# Altium PCB PCB.PcbDoc
Units mm, origin at the board's own origin, x right, y up, seen from the top; angles counter-clockwise.
Board outline 18.3 x 49.6 mm, 2 copper layers (Top Layer, Bottom Layer), stack 1.57 mm thick; 20 components, 30 nets, 91 pads, 23 vias.
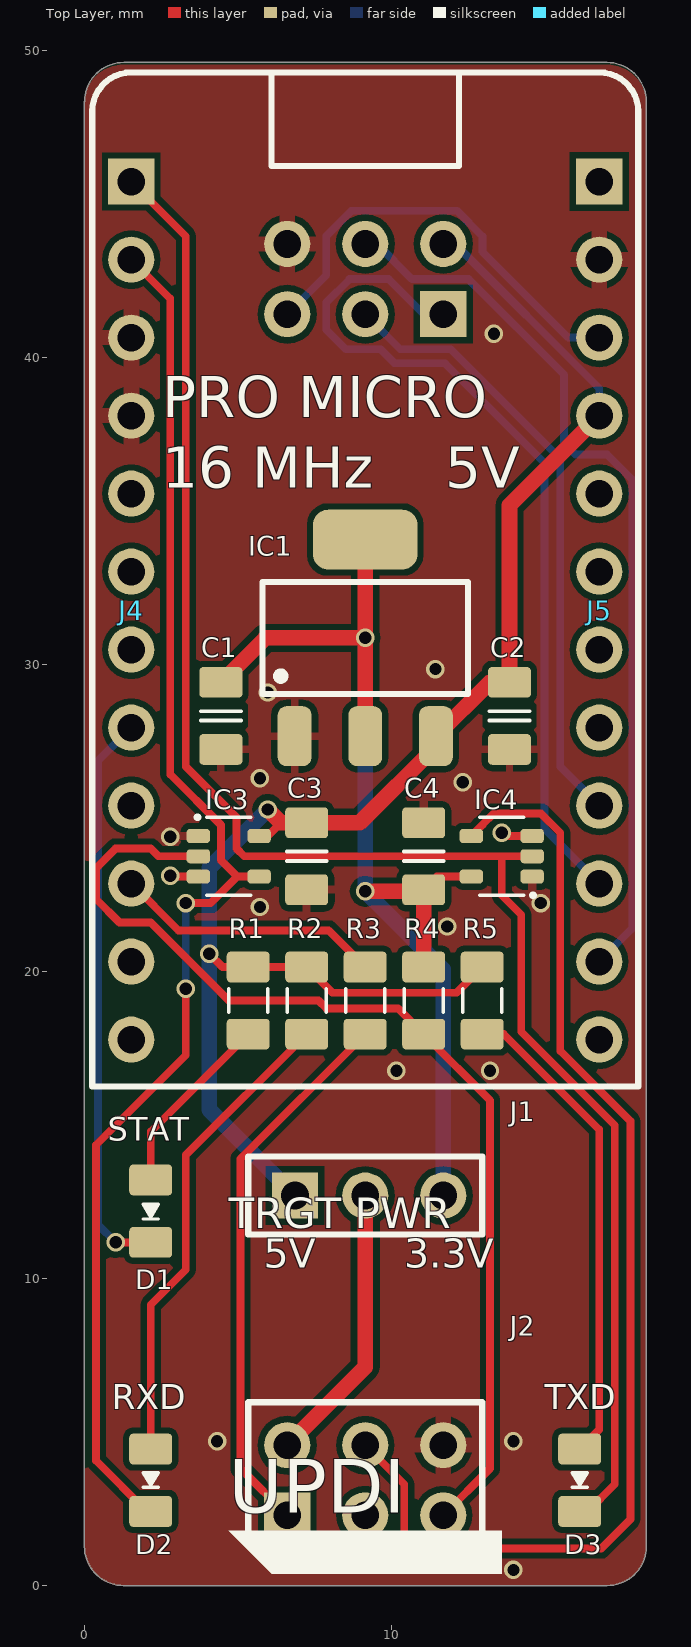
[diagram p0: Top Layer view]
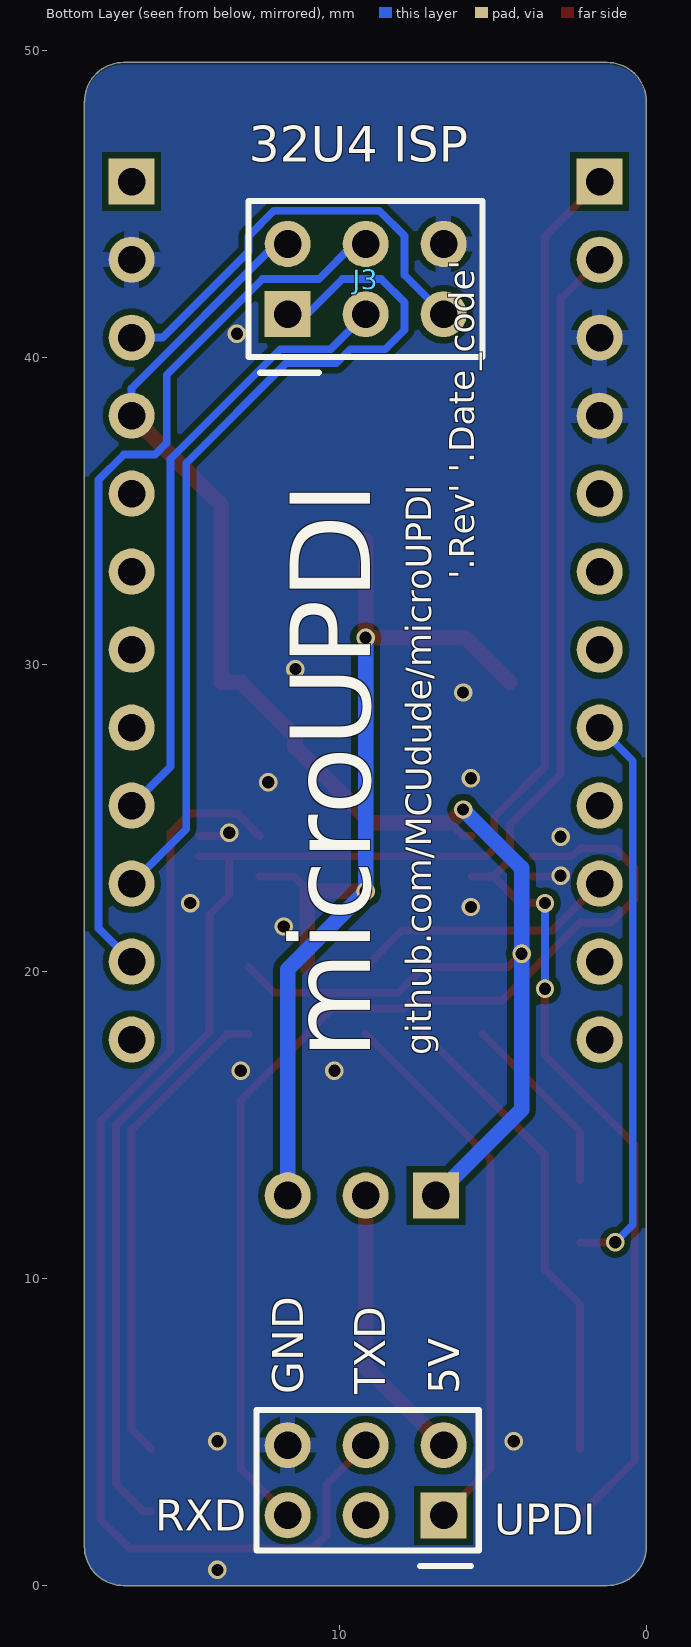
[diagram p1: Bottom Layer view, seen from below]
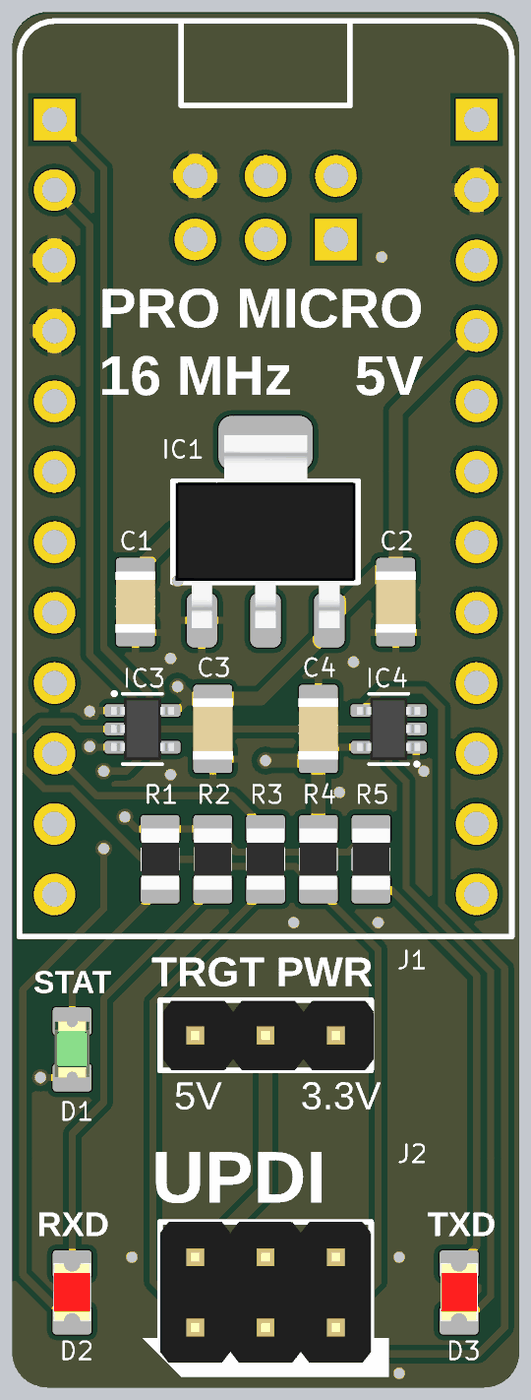
[diagram p2: 3D render of the assembled board from above, using the file's embedded part models]

## Layer stack, top to bottom
Top Solder: solder mask 0.015, Solder Resist, Dk 3.5
Top Layer: signal copper 0.035
Dielectric 1: core 1.5, PP 7628, Dk 4.2
Bottom Layer: signal copper 0.035
Bottom Solder: solder mask 0.015, Solder Resist, Dk 3.5

## Board outline
0,1.27 0,48.33 0.005,48.33 cw(c1.275,48.33) 1.275,49.6 17.025,49.6 cw(c17.025,48.33) 18.295,48.33 18.3,48.33 18.3,1.27 cw(c17.03,1.27) 17.03,0 1.27,0 cw(c1.27,1.27)

## Design rules (kind name [scope] priority, off if disabled: settings)
BoardOutlineClearance [All] p1 off: gap=0.254 ignorepadtopadclearanceinfootprint=FALSE except(0: Arc-SplitContinuation Track-SplitContinuation SMDPad-SplitContinuation THPad-OutlineEdge THPad-CavityEdge THPad-CutoutEdge THPad-SplitBarrior THPad-SplitContinuation Via-SplitContinuation Fill-SplitContinuation Poly-OutlineEdge Poly-CavityEdge Poly-CutoutEdge Poly-SplitBarrior Poly-SplitContinuation Region-SplitContinuation Text-SplitContinuation; 0.1: Text-OutlineEdge Text-CavityEdge Text-CutoutEdge Text-SplitBarrior; 1: SMDPad-OutlineEdge SMDPad-CavityEdge SMDPad-CutoutEdge SMDPad-SplitBarrior)
Clearance LED_clearance [HasFootprint('LED-1305-REVERSED-WHITE') OR HasFootprint('LED-1305-REVERSED-BLUE')] p1: gap=0.889 ignorepadtopadclearanceinfootprint=TRUE
Clearance FiducialClearance [HasFootprint('FIDUCIAL_1x3MM')] p2: gap=1.016 ignorepadtopadclearanceinfootprint=TRUE
Clearance [All] p3: gap=0.203 ignorepadtopadclearanceinfootprint=TRUE
ComponentClearance [All] p1: gap=0.254 collisioncheckmode=3 verticalgap=-0.127 showdistances=FALSE
HoleSize [All] p1: absolutevalues=TRUE maxlimit=10.16 minlimit=0.025 maxpercent=80.000 minpercent=20.000
MinimumSolderMaskSliver [All] p1: minsoldermaskwidth=0
PlaneClearance [All] p1: clearance=0.203
PlaneConnect [All] p1: pad.planeconnectstyle=Relief pad.reliefexpansion=0.254 pad.reliefentries=4 pad.reliefconductorwidth=0.254 pad.reliefairgap=0.254 via.planeconnectstyle=Direct via.reliefexpansion=0.508 via.reliefentries=4 via.reliefconductorwidth=0.254 via.reliefairgap=0.254
PolygonConnect D2PAK_connect [HasFootprint('TO-263-5')] p1: connectstyle=Relief reliefconductorwidth=0.508 reliefentries=4 polygonreliefangle="90 Angle" airgapwidth=0.203
PolygonConnect Mounting_hole_connect [asMM(HoleDiameter) = 3.2] p2: connectstyle=Direct reliefconductorwidth=0.254 reliefentries=4 polygonreliefangle="90 Angle" airgapwidth=0.254
PolygonConnect [All] p3: thpad.connectstyle=Relief thpad.reliefconductorwidth=0.508 thpad.reliefentries=4 thpad.polygonreliefangle="90 Angle" thpad.airgapwidth=0.203 smdpad.connectstyle=Relief smdpad.reliefconductorwidth=0.254 smdpad.reliefentries=4 smdpad.polygonreliefangle="90 Angle" smdpad.airgapwidth=0.203 via.connectstyle=Direct via.reliefconductorwidth=0.254 via.reliefentries=4 via.polygonreliefangle="90 Angle" via.airgapwidth=0.254
RoutingVias [All] p1: holewidth=0.5 width=1 viastyle="Through Hole" minholewidth=0.4 minwidth=0.6 maxholewidth=1 maxwidth=1.25
SilkToSilkClearance [All] p1: silktosilkclearance=0.076
SilkToSolderMaskClearance [IsPad] p1: minsilkscreentomaskgap=0.076 clearancetoexposedcopper=TRUE
SolderMaskExpansion [All] p1: expansion=0.05
UnRoutedNet [All] p1: checkbadconnections=TRUE
Width [All] p1: maxlimit=2.54 minlimit=0.203 preferedwidth=0.254
22 further rules are at their usual default settings.

## Components (designator, comment, footprint, x,y, rotation, side; value= is the part's Value field where it differs from the comment)
C1 "Generic bipolar capacitor" "0805 CAPACITOR" 4.445,28.321 r90 top value=1u
C2 "Generic bipolar capacitor" "0805 CAPACITOR" 13.843,28.321 r90 top value=1u
C3 "Generic bipolar capacitor" "0805 CAPACITOR" 7.239,23.749 r90 top value=100n
C4 "Generic bipolar capacitor" "0805 CAPACITOR" 11.049,23.749 r270 top value=100n
D1 "Green" LED-GREEN-0805 2.159,12.192 r270 top
D2 "Red" LED-RED-0805 2.159,3.429 r270 top
D3 "Red" LED-RED-0805 16.129,3.429 r270 top
IC1 "1117-3.3" SOT-223 9.144,30.861 r0 top
IC3 "74LVC1G125" SOT-353 4.699,23.749 r270 top
IC4 "74LVC1G125" SOT-353 13.589,23.749 r90 top
J1 "HEADER 1x3 MALE" HEADER-MALE-STRAIGHT-1x3-LOCKED 9.144,12.7 r0 top (schematic designator J2)
J2 "HEADER 2x3 MALE" HEADER-MALE-STRAIGHT-2x3-LOCKED 9.144,3.429 r0 top (schematic designator J1)
J3 "HEADER 2x3 MALE" HEADER-MALE-STRAIGHT-2x3-LOCKED 9.144,42.545 r180 bottom
J4 "HEADER 1x12 FEMALE" HEADER-FEMALE-STRAIGHT-1x12 1.524,31.75 r270 top
J5 "HEADER 1x12 FEMALE" HEADER-FEMALE-STRAIGHT-1x12 16.764,31.75 r270 top
R1 "Generic resistor" "0805 RESISTOR" 5.334,19.05 r270 top value=1k (schematic designator R3)
R2 "Generic resistor" "0805 RESISTOR" 7.239,19.05 r270 top value=1k (schematic designator R1)
R3 "Generic resistor" "0805 RESISTOR" 9.144,19.05 r270 top value=330R (schematic designator R5)
R4 "Generic resistor" "0805 RESISTOR" 11.049,19.05 r90 top value=10k
R5 "Generic resistor" "0805 RESISTOR" 12.954,19.05 r270 top value=1k (schematic designator R2)

## Footprints (in the part's own frame and the unit in brackets; to place one, negate y for a bottom-side part, rotate by r counter-clockwise, add the part's x,y. Pads: shape width x height; smd on the part's side, far side on the other; paste and mask are expansions set on the pad)
"0805 CAPACITOR" [mm] "Chip Capacitor, Body 2.0x1.2mm, EIA 0805, IPC Medium Density"
  round 0.254 on Mech15: 0(0,0)
  rrect25% 1x1.4 smd: 1(-1.092,0) 2(1.092,0)
  Top Layer pour cut-out: -0.559,0.686 -0.356,0.889 0.356,0.889 0.559,0.686 0.559,-0.686 0.356,-0.889 -0.356,-0.889 -0.559,-0.686
  silkscreen extent -0.15,-0.65 0.15,0.65, body extent -1.1,-0.72 1.1,0.73, height 1.34
"0805 RESISTOR" [mm] "Chip Resistor, Body 2.0x1.2mm, EIA 0805, IPC Medium Density"
  round 0.254 on Mech15: 0(0,0)
  rrect25% 1x1.4 smd: 1(-1.092,0) 2(1.092,0)
  Top Layer pour cut-out: -0.559,0.686 -0.356,0.889 0.356,0.889 0.559,0.686 0.559,-0.686 0.356,-0.889 -0.356,-0.889 -0.559,-0.686
  silkscreen extent -0.38,-0.64 0.38,0.64, body extent -1.1,-0.67 1.1,0.68, height 0.69
HEADER-FEMALE-STRAIGHT-1x12 [mm]
  rect 1.5x1.5 hole 0.9: 1(-13.97,0)
  round 1.5 hole 0.9: 2(-11.43,0) 3(-8.89,0) 4(-6.35,0) 5(-3.81,0) 6(-1.27,0) 7(1.27,0) 8(3.81,0) 9(6.35,0) 10(8.89,0) 11(11.43,0) 12(13.97,0)
HEADER-MALE-STRAIGHT-1x3-LOCKED [mm]
  rect 1.5x1.5 hole 0.9: 1(-2.286,0)
  round 1.5 hole 0.9: 2(0,0) 3(2.54,0)
  silkscreen extent -3.81,-1.27 3.81,1.27, body extent -3.71,-1.25 3.91,1.25, height 8.2
HEADER-MALE-STRAIGHT-2x3-LOCKED [mm]
  rect 1.5x1.5 hole 0.9: 1(-2.54,-1.143)
  round 1.5 hole 0.9: 2(-2.54,1.143) 3(0,-1.143) 4(0,1.143) 5(2.54,-1.143) 6(2.54,1.143)
  silkscreen extent -3.81,-2.54 3.81,2.54, body extent -3.81,-2.54 3.81,2.54, height 8.6
LED-GREEN-0805 [mm]
  round 0.254 on Mech15: 0(0,0)
  rrect25% 1x1.4 smd: A(-1.016,0) K(1.016,0)
  silkscreen extent -0.23,-0.25 0.25,0.25, body extent -1.01,-0.62 1.01,0.63, height 1.15
LED-RED-0805 [mm]
  round 0.254 on Mech15: 0(0,0)
  rrect25% 1x1.4 smd: A(-1.016,0) K(1.016,0)
  silkscreen extent -0.25,-0.25 0.23,0.25, body extent -1.05,-0.67 1.05,0.68, height 0.95
SOT-223 [mm] "SOT-223/SC-73; 4 Leads; Body 6.7 x 7.3 mm, inc. leads (LxW max)"
  rrect50% 1.1x1.95 smd: 1(-2.3,-3.2) 2(0,-3.2) 3(2.3,-3.2)
  rrect50% 3.4x1.95 smd: 4(0,3.2)
  silkscreen extent -3.35,-1.83 3.35,1.83, body extent -3.25,-3.48 3.25,3.48, height 1.66
SOT-353 [mil] "SOT-353; 5 Leads; Body 2.05x1.25 mm"
  round 19.68 on Mech15: 0(0,0)
  rrect50% 18x30 smd: 1(-26,-39) 2(0,-39) 3(26,-39) 4(26,39) 5(-26,39)
  silkscreen extent -50,-40 50,28, body extent -44,-45 44,45, height 43

## Part data
C1 C2: library part CAP-CER-0805-1U-16V, "Cap Ceramic 0805 1u 16V Y5V", Dielectric=Y5V, Package=0805, Voltage Rating=16V, Component type=Capacitor, Notes="Generic, choose one that meets spec"
C3 C4: library part CAP-CER-0805-100N-50V, "Cap Ceramic 0805 100n 50V X7R", Dielectric=X7R, Package=0805, Voltage Rating=50V, Component type=Capacitor, Notes="Generic, choose one that meets spec"
D1: library part LED-0805-GREEN, "LED 0805 Green", Package=0805, Component type=LED
D2 D3: library part LED-0805-RED, "LED 0805 Red", Package=0805, Component type=LED
IC1: library part REG-POS-3.3V-1117, "Positive 3.3V regulator 1A SOT-223", Package=SOT-223, Component type=IC, Manufacturer Part Number=1117-3.3, Notes="Generic 1117-3.3"
IC3 IC4: library part IC-74LVC1G125, "Singe Buffer with 3-State Output", Package=SOT-353, Component type=IC, Manufacturer Part Number=74LVC1G125
J1: library part CON-HEADER-MALE-STRAIGHT-1x3, "Header male straight 1x3", Component type=Connector
J2 J3: library part CON-HEADER-MALE-STRAIGHT-2x3, "Header male straight 2x3", Component type=Connector
J4 J5: library part CON-HEADER-FEMALE-STRAIGHT-1x12, "Header female straight 1x12", Component type=Connector
R1 R2 R5: library part RES-0805-1k, "Resistor 0805 1k 1%", Package=0805, Tolerence=1%, Component type=Resistor, Notes="Generic, choose one that meets spec"
R3: library part RES-0805-330R, "Resistor 0805 330R 1%", Package=0805, Component type=Resistor, Notes="Generic, choose one that meets spec"
R4: library part RES-0805-10k, "Resistor 0805 10k 1%", Package=0805, Component type=Resistor, Notes="Generic, choose one that meets spec"

## Via types
v1: diameter 0.6, hole 0.4, Top Layer to Bottom Layer, tented both sides, 23 vias

## Nets (pads, with @x,y where several pads share a name; then routed paths per layer and width w, separated by ;. In a path a pad name is that pad's centre, name@x,y a point inside that pad or via, vN(x,y) a via of type N, cw(c..) or ccw(c..) an arc to the next point about the centre after c; other vN are vias at no path point)
+3.3V: C1.2 C4.2 IC1.2 IC1.4 IC4.5 J1.3 R4.2 | length 37.1
  Top Layer w0.254: C4.2 11.481,23.089 IC4.5
  Top Layer w0.508: C1.2 5.893,30.861 v1(9.144,30.861) ; v1(9.144,22.606) 10.998,22.606 C4.2 R4.2 ; IC1.2 v1(9.144,30.861) ; IC1.4 v1(9.144,30.861)
  Bottom Layer w0.508: v1(9.144,30.861) v1(9.144,22.606) 11.684,20.066 J1.3
+5V: C2.2 C3.2 IC1.3 IC3.5 J1.1 J3.2 J5.4 R1.1 R2.1 R5.1 | length 53.1
  Top Layer w0.254: v1(4.064,20.574) 4.496,20.142 R1.1 R2.1 8.077,19.304 12.116,19.304 R5.1 ; IC3.5 5.969,24.409 6.401,24.841
  Top Layer w0.508: v1(5.969,25.273) 6.401,24.841 C3.2 8.966,24.841 11.444,27.319 IC1.3 13.196,29.413 C2.2 13.843,35.179 J5.4
  Bottom Layer w0.254: J3.2 12.065,43.688 16.764,38.989 J5.4
  Bottom Layer w0.508: v1(5.969,25.273) 4.064,23.368 v1(4.064,20.574) 4.064,15.494 J1.1
\R\S\T\: J3.5 J5.3 | length 14.3
  Bottom Layer w0.254: J3.5 7.874,42.672 7.874,43.946 8.697,44.768 12.131,44.768 12.96,43.94 12.96,43.44 15.76,40.64 J5.3
A0: J5.8
A1: J5.7
A2: J5.6
A3: J5.5
D2: J4.5
D3: J4.6
D4: J4.7
D5/STATUS: D1.K J4.8 | length 18.6
  Top Layer w0.254: v1(1.016,11.176) D1.K
  Bottom Layer w0.254: v1(1.016,11.176) 0.444,11.748 0.444,26.86 J4.8
D6: J4.9
D7: J4.10 R3.1 | length 8.7
  Top Layer w0.254: J4.10 1.536,22.86 3.06,21.336 7.95,21.336 R3.1
D8: J4.11
D9: J4.12
D10: J5.12
GND: C1.1 C2.1 C3.1 C4.1 IC1.1 IC3.1 IC3.3 IC4.1 IC4.3 J2.6 J3.6 J4.3 J4.4 J5.2 | length 2
  Top Layer w0.254: v1(2.794,23.114) 2.819,23.089 IC3.3 ; v1(13.589,24.511) 13.691,24.409 IC4.3
  other v1: 13.97,0.508 4.318,4.699 13.97,4.699 10.16,16.764 13.208,16.764 11.811,21.463 5.715,22.098 14.859,22.225 2.794,24.384 12.319,26.162 5.715,26.289 5.969,29.083 11.43,29.845 13.335,40.767
MISO: J3.1 J5.10 | length 28.8
  Bottom Layer w0.254: J3.1 11.049,41.402 9.906,42.545 8.636,42.545 7.874,41.783 7.874,40.894 8.509,40.259 9.64,40.259 10.098,39.802 11.737,39.802 14.986,36.553 14.986,24.638 J5.10
MOSI: J3.4 J5.11 | length 29.3
  Bottom Layer w0.254: J3.4 9.525,43.688 10.668,42.545 12.508,42.545 15.621,39.432 15.621,37.211 16.002,36.83 17.022,36.83 17.844,36.007 17.844,21.4 J5.11
NetD1_A: D1.A R1.2 | length 6.1
  Top Layer w0.254: D1.A 2.159,14.783 R1.2
NetD2_A: D2.A R2.2 | length 15.6
  Top Layer w0.254: D2.A 2.159,9.144 3.302,10.287 3.302,14.021 R2.2
NetD2_K: D2.K IC3.4 J4.2 | length 46.1
  Top Layer w0.254: J4.2 2.794,41.91 2.794,26.416 4.445,24.765 4.445,23.622 4.978,23.089 ; D2.K 2.032,2.413 0.381,4.064 0.381,14.351 3.302,17.272 v1(3.302,19.431) ; v1(3.302,22.225) 4.115,22.225 4.978,23.089 ; IC3.4 4.978,23.089
  Bottom Layer w0.254: v1(3.302,19.431) v1(3.302,22.225)
NetD3_A: D3.A R5.2 | length 15.8
  Top Layer w0.254: R5.2 13.654,17.958 16.764,14.847 16.764,5.08 D3.A
NetD3_K: D3.K IC4.2 J4.1 | length 56.4
  Top Layer w0.254: J4.1 3.302,43.942 3.302,26.67 4.953,25.019 4.953,24.003 5.207,23.749 13.589,23.749 ; IC4.2 13.589,23.749 ; D3.K 16.383,2.413 17.272,3.302 17.272,14.986 14.224,18.034 14.224,21.844 13.589,22.479 13.589,23.749
RXD: IC3.2 J2.5 R4.1 | length 34.4
  Top Layer w0.254: IC3.2 2.413,23.749 2.159,24.003 1.016,24.003 0.381,23.368 0.381,22.352 1.143,21.59 2.157,21.59 4.697,19.05 7.62,19.05 7.874,18.796 10.211,18.796 R4.1 13.208,15.799 13.208,3.81 J2.5
SCK: J3.3 J5.9 | length 20.1
  Bottom Layer w0.254: J3.3 10.287,40.259 11.926,40.259 15.494,36.691 15.494,26.67 J5.9
TXD: IC4.4 J2.4 | length 38.2
  Top Layer w0.254: J2.4 10.414,3.302 10.414,1.651 10.859,1.206 16.827,1.206 17.78,2.159 17.78,15.125 15.494,17.411 15.494,24.511 14.864,25.141 13.328,25.141 12.959,24.772 12.959,24.77 IC4.4
UPDI: J2.1 R3.2 | length 18
  Top Layer w0.254: J2.1 5.08,3.81 5.08,13.894 R3.2
VCC: J1.2 J2.2 | length 9.2
  Top Layer w0.508: J2.2 9.144,7.112 J1.2
VIN: J5.1
pads on no net: C1.0 C2.0 C3.0 C4.0 D1.0 D2.0 D3.0 IC3.0 IC4.0 J2.3 R1.0 R2.0 R3.0 R4.0 R5.0

## Polygon pours and split planes (outlines as drawn)
GND on Bottom Layer "GND bottom" (solid, remove dead copper, pour order 0): 0,1.27 0,48.26 cw(c1.27,48.26) 1.27,49.53 17.018,49.53 cw(c17.018,48.26) 18.288,48.26 18.288,1.27 cw(c17.018,1.27) 17.018,0 1.27,0 cw(c1.27,1.27)
GND on Top Layer "GND top" (solid, remove dead copper, pour order 2): 0,1.27 0,48.26 cw(c1.27,48.26) 1.27,49.53 17.018,49.53 cw(c17.018,48.26) 18.288,48.26 18.288,1.27 cw(c17.018,1.27) 17.018,0 1.27,0 cw(c1.27,1.27)

## Silkscreen, mask and mechanical layers (free items; w line width, h text height)
Top Overlay:
  region: 13.589,1.778 13.589,0.381 6.096,0.381 4.699,1.778
  lines w0.2: 6.096,49.276 6.096,46.228 12.192,46.228 12.192,49.276 ; 0.254,16.256 0.254,45.72 0.254,48.006 cw(c1.524,48.006) 1.524,49.276 14.732,49.276 16.764,49.276 cw(c16.764,48.006) 18.034,48.006 18.034,16.256 0.254,16.256
  text "PRO MICRO / 16 MHz    5V" at 2.54,35.306 h2.3
  text "STAT" at 0.762,14.224 h1.3
  text "TRGT PWR" at 4.699,11.303 h1.7
  text "5V" at 5.842,10.033 h1.6
  text "3.3V" at 10.414,10.033 h1.6
  text "RXD" at 0.889,5.461 h1.4
  text "TXD" at 14.986,5.461 h1.4
  text "UPDI" at 4.699,1.778 h3
Bottom Overlay:
  lines w0.2: 5.715,0.635 7.366,0.635 ; 10.668,39.497 12.573,39.497 ; 10.668,40.005 12.7,40.005 ; 5.461,1.143 12.7,1.143 12.7,5.715 5.461,5.715 5.461,1.143
  text "32U4 ISP" at 12.954,45.974 h2
  text "'.Rev' '.Date_code'" at 5.334,32.766 h1.4 r270
  text "github.com/MCUdude/microUPDI" at 6.731,17.272 h1.43 r270
  text "microUPDI" at 8.128,17.145 h4.5 r270
  text "5V" at 6.096,6.223 h1.02 r270
  text "TXD" at 8.509,6.223 h1.02 r270
  text "GND" at 11.176,6.223 h1.02 r270
  text "RXD" at 16.002,1.778 h1.02
  text "UPDI" at 4.953,1.651 h1.02
Mechanical 1:
  lines w0.1: 0,48.33 0,45.72 0,3.81 0,1.27 ccw(c1.27,1.27) 1.27,0 17.03,0 ccw(c17.03,1.27) 18.3,1.27 18.3,16.51 18.3,46.99 18.3,48.33 ; 0.005,48.33 cw(c1.275,48.33) 1.275,49.6 16.132,49.6 17.025,49.6 cw(c17.025,48.33) 18.295,48.33
Drill Drawing:
  circle w0.254: c2.556,62.8 r0.847
  lines w0.254: 1.709,58.144 3.403,58.144 3.403,59.837 1.709,59.837 1.709,58.144
  lines w0.381: 0.191,57.001 177.485,57.001 ; 0.191,64.621 177.485,64.621 ; 14.183,53.191 14.183,68.431 ; 27.895,53.191 27.895,68.431 ; 56.335,53.191 56.335,68.431 ; 69.184,53.191 69.184,68.431 ; 87.823,53.191 87.823,68.431 ; 125.911,53.191 125.911,68.431 ; 140.893,53.191 140.893,68.431 ; 159.837,53.191 159.837,68.431 ; 0.191,53.191 177.485,53.191 177.485,68.431 0.191,68.431 0.191,53.191
  text "Symbol" at 2.476,65.764 h1.83
  text "Count" at 15.326,65.764 h1.83
  text "Hole Size" at 29.038,65.764 h1.83
  text "Plated" at 57.478,65.764 h1.83
  text "Hole Type" at 70.327,65.764 h1.83
  text "Drill Layer Pair" at 88.966,65.764 h1.83
  text "Via/Pad" at 127.054,65.764 h1.83
  text "Pad Shape" at 142.036,65.764 h1.83
  text "Template" at 160.98,65.764 h1.83
  text "23" at 15.326,61.954 h1.52
  text "0,400mm (15,75mil)" at 29.038,61.954 h1.52
  text "PTH" at 57.478,61.954 h1.52
  text "Round" at 70.327,61.954 h1.52
  text "Top Layer - Bottom Layer" at 88.966,61.954 h1.52
  text "Via" at 127.054,61.954 h1.52
  text "Rounded" at 142.036,61.954 h1.52
  text "(Mixed)" at 160.98,61.954 h1.52
  text "39" at 15.326,58.144 h1.52
  text "0,900mm (35,43mil)" at 29.038,58.144 h1.52
  text "PTH" at 57.478,58.144 h1.52
  text "Round" at 70.327,58.144 h1.52
  text "Top Layer - Bottom Layer" at 88.966,58.144 h1.52
  text "Pad" at 127.054,58.144 h1.52
  text "(Mixed)" at 142.036,58.144 h1.52
  text "(Mixed)" at 160.98,58.144 h1.52
  text "62 Total" at 15.326,54.334 h1.52

## Dimensions
0,0 to 0,49.6 on Drill Drawing
0,0 to 18.3,1.27 on Drill Drawing

## Text inside footprints (layer, text, board x,y; h text height)
D1: Assembly top "K" at 1.397,10.922 h0.38 r270; Assembly top "A" at 1.397,13.716 h0.38 r270
D2: Assembly top "K" at 1.397,2.159 h0.38 r270; Assembly top "A" at 1.397,4.953 h0.38 r270
D3: Assembly top "K" at 15.367,2.159 h0.38 r270; Assembly top "A" at 15.367,4.953 h0.38 r270